# EAGLE board shield_vert (EAGLE 6.5.0)
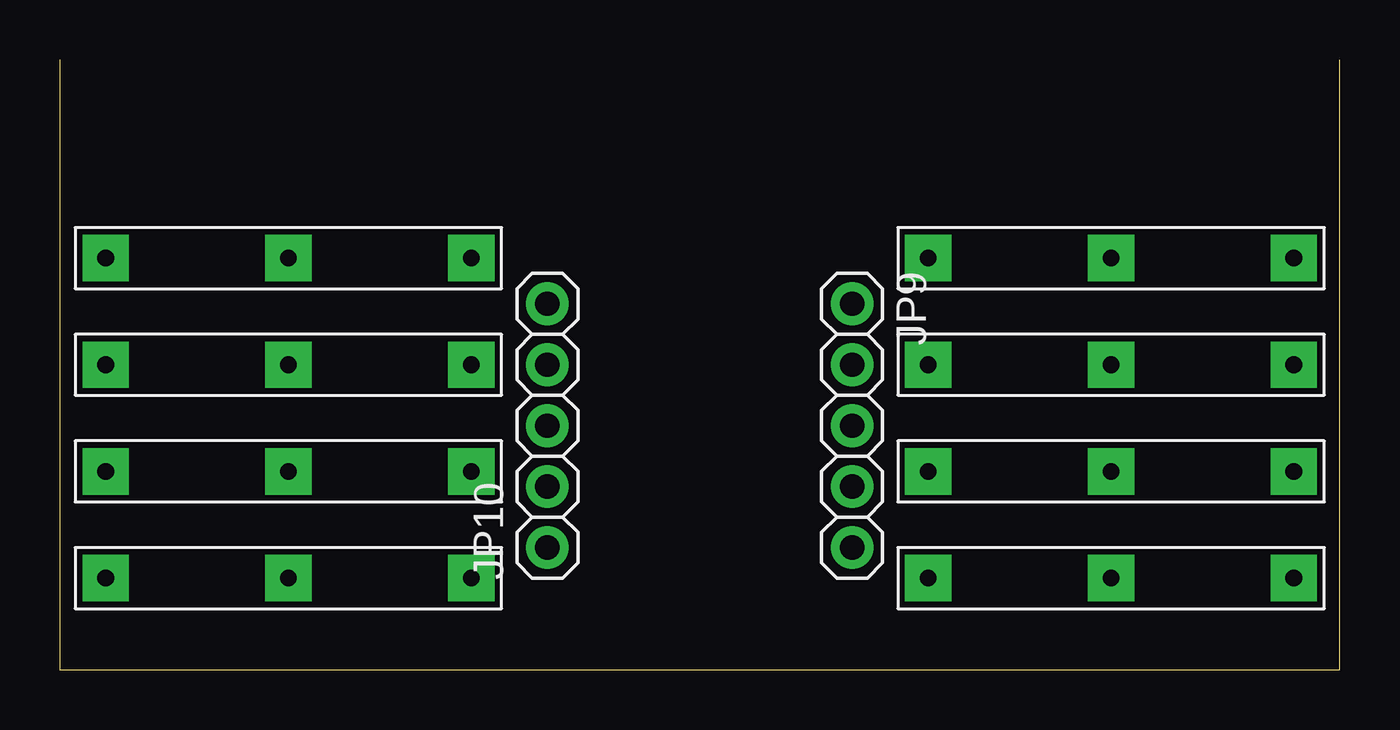
[diagram p0: board, top side]
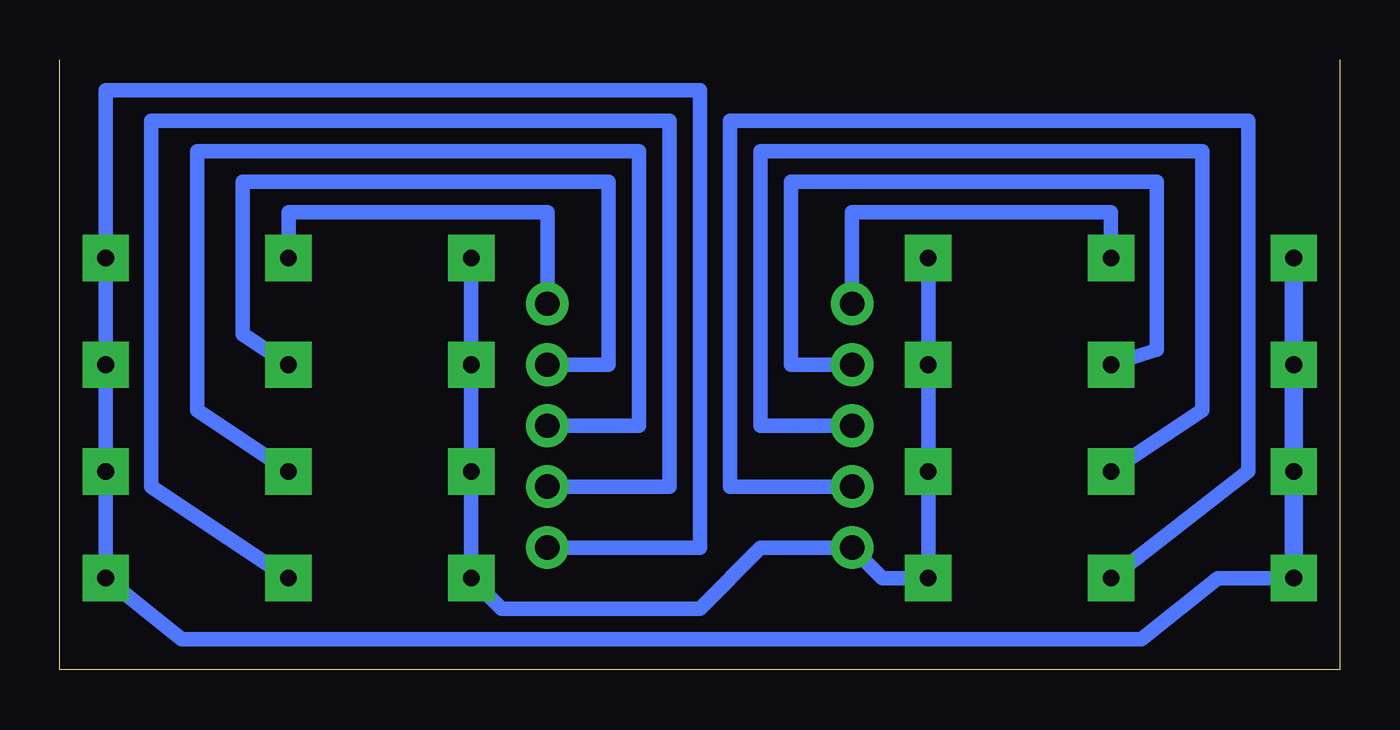
[diagram p1: board, bottom side, seen from below]

Size 53.34 x 25.4 mm. Coordinates in mm from the lower left corner, seen from the top.
Outline: 53.34,25.4 53.34,0 0,0 0,25.4
Copper layers (1*16): Top 0.035mm / dielectric 1.5mm / Bottom 0.035mm
Design rules "default": minimum track width 10mil, minimum drill 24mil, track to track 8mil, track to pad 8mil, pad to pad 8mil, via to via 8mil, smd to smd 8mil, copper to edge 40mil, drill to drill 8mil, minimum pad ring 10mil, minimum via ring 8mil, stop-mask expansion 4mil, vias tented up to drill 0mil, thermal gap 10mil

## Footprints (pad centres in the part's own frame; a part is rotated, then mirrored left to right if it is on the bottom)
1X03-POTENTIOSHIELD = drill 0.7 pad 1.93 square: 1 -7.62,0; 2 0,0; 3 7.62,0
1X05 = drill 1.016 pad 1.778: 1 -5.08,0; 2 -2.54,0; 3 0,0; 4 2.54,0; 5 5.08,0

## Placement (x,y rotation side)
JP1  [1X03-POTENTIOSHIELD]  43.81,17.14 0 top
JP2  [1X03-POTENTIOSHIELD]  43.81,12.7 0 top
JP3  [1X03-POTENTIOSHIELD]  43.81,8.26 0 top
JP4  [1X03-POTENTIOSHIELD]  43.81,3.81 0 top
JP5  [1X03-POTENTIOSHIELD]  9.53,3.81 180 top
JP6  [1X03-POTENTIOSHIELD]  9.53,8.26 180 top
JP7  [1X03-POTENTIOSHIELD]  9.53,12.7 180 top
JP8  [1X03-POTENTIOSHIELD]  9.53,17.14 180 top
JP9  [1X05]  33.02,10.16 270 top
JP10  [1X05]  20.32,10.16 90 top

## Library data of the parts
JP1-JP10 = manticore-lib

## Nets
GND: JP1.1 JP2.1 JP3.1 JP4.1 JP5.1 JP6.1 JP7.1 JP8.1 JP10.1
N$1: JP1.2 JP9.1
N$2: JP2.2 JP9.2
N$3: JP3.2 JP9.3
N$4: JP4.2 JP9.4
N$5: JP5.2 JP10.2
N$6: JP6.2 JP10.3
N$7: JP7.2 JP10.4
N$8: JP8.2 JP10.5
VCC: JP1.3 JP2.3 JP3.3 JP4.3 JP5.3 JP6.3 JP7.3 JP8.3 JP9.5

## Tracks (layer width: path | path; a pad name or v marks a point on that pad's centre or on a via)
GND
  Bottom 0.61: JP8.1 JP7.1 JP6.1 JP5.1 19.05,3.81 JP10.1 24.13,5.08 26.67,2.54 34.92,2.54 JP4.1 JP3.1 JP2.1 JP1.1
N$1
  Bottom 0.61: JP9.1 33.02,19.05 43.81,19.05 JP1.2
N$2
  Bottom 0.61: JP2.2 45.72,13.97 45.72,20.32 30.48,20.32 30.48,12.7 JP9.2
N$3
  Bottom 0.61: JP9.3 29.21,10.16 29.21,21.59 47.62,21.59 47.62,10.79 JP3.2
N$4
  Bottom 0.61: JP9.4 27.94,7.62 27.94,22.86 49.53,22.86 49.53,7.62 JP4.2
N$5
  Bottom 0.61: JP5.2 3.81,8.26 3.81,22.86 25.4,22.86 25.4,7.62 JP10.2
N$6
  Bottom 0.61: JP10.3 24.13,10.16 24.13,21.59 5.71,21.59 5.71,10.79 JP6.2
N$7
  Bottom 0.61: JP10.4 22.86,12.7 22.86,20.32 7.62,20.32 7.62,13.34 JP7.2
N$8
  Bottom 0.61: JP8.2 9.53,19.05 20.32,19.05 JP10.5
VCC
  Bottom 0.406: JP4.3 JP1.3 JP2.3 JP3.3 JP4.3
  Bottom 0.61: JP5.3 5.08,3.81 8.26,1.27 48.26,1.27 JP4.3 51.44,24.13 26.67,24.13 26.67,5.08 JP9.5
  Bottom 0.762: JP8.3 JP7.3 JP6.3 JP5.3